# EAGLE board TSOC_CYBLE_R0_1 (EAGLE 6.6.0)
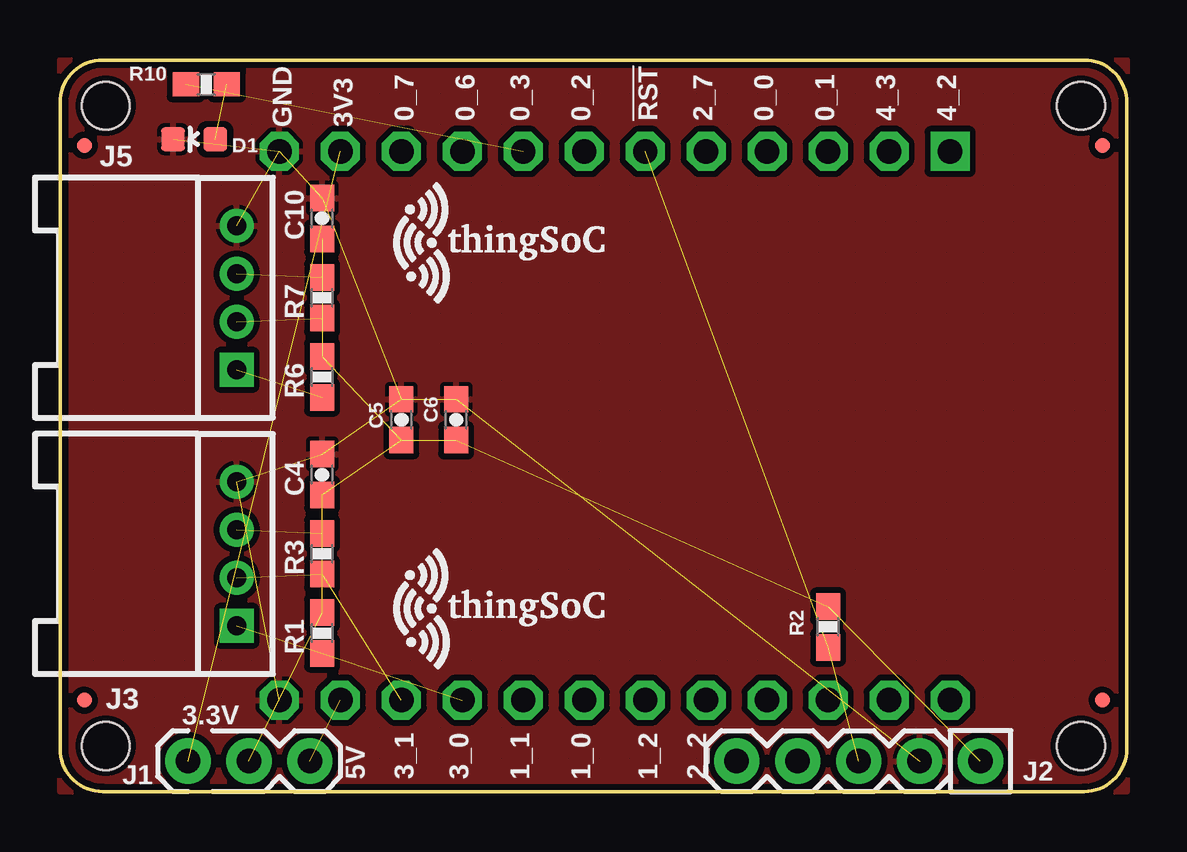
[diagram p0: board, top side]
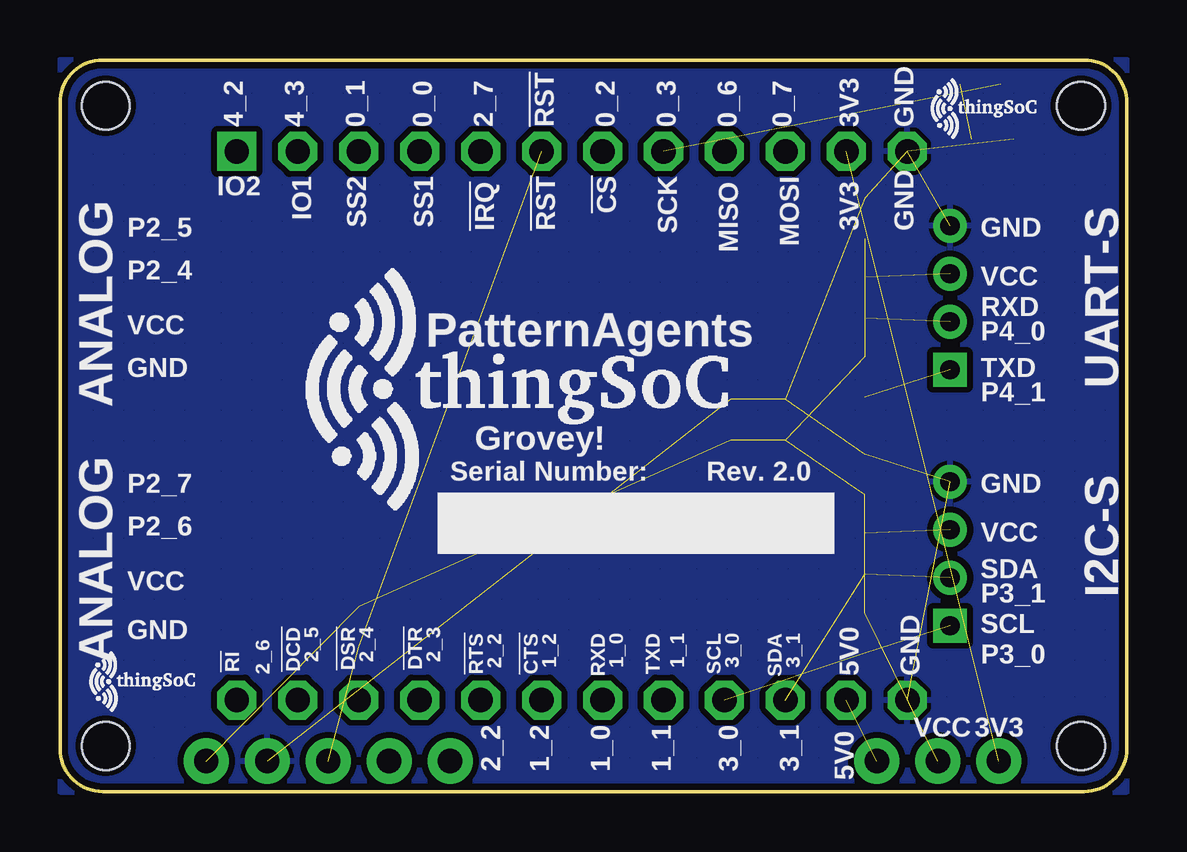
[diagram p1: board, bottom side, seen from below]

Size 44.45 x 30.48 mm. Coordinates in mm from the lower left corner, seen from the top.
Copper layers (1*16): Top 0.035mm / dielectric 1.5mm / Bottom 0.035mm
Design rules "PatternAgents_7mil": minimum track width 7mil, minimum drill 14mil, track to track 7mil, track to pad 7mil, pad to pad 7mil, via to via 7mil, smd to smd 7mil, copper to edge 7mil, drill to drill 7mil, minimum pad ring 12mil, minimum via ring 10mil, stop-mask expansion 4mil, vias tented up to drill 25mil, thermal gap 7mil

## Footprints (pad centres in the part's own frame; a part is rotated, then mirrored left to right if it is on the bottom)
0603-CAP = smd 1.1 x 1: 1 -0.85,0; 2 0.85,0
LED-0603 = smd 1 x 1: A 0,-0.877; C 0,0.877
MICRO-FIDUCIAL = smd 0.635 x 0.635: 1 0,0
JMP-3-NO-PTH-2.54 = drill 1.016 pad 1.88: 1 0,0; 2 2.54,0; 3 5.08,0
PSOC_JTAG_MINSILK = drill 1.016 pad 1.88: 1 -5.08,0; 2 -2.54,0; 3 0,0; 4 2.54,0; 5 5.08,0
HW4-2.0-90D = drill 0.8 pad 1.27 square: 1 -3,0 | drill 0.8 pad 1.27: 2 -1,0; 3 1,0; 4 3,0
0603-RES = smd 1.1 x 1: 1 -0.85,0; 2 0.85,0
TSOC-BB-BRD-DIM = hole 2: 13.335,16.891; -13.335,16.891; 13.335,-23.749; -13.335,-23.749
TSOC-BB-S24 = drill 1.016 square: 1B -11.43,11.43 | drill 1.016 octagon: 1C 11.43,11.43; 2B -11.43,8.89; 2C 11.43,8.89; 3B -11.43,6.35; 3C 11.43,6.35; 4B -11.43,3.81; 4C 11.43,3.81; 5B -11.43,1.27; 5C 11.43,1.27; 6B -11.43,-1.27; 6C 11.43,-1.27; 7B -11.43,-3.81; 7C 11.43,-3.81; 8B -11.43,-6.35; 8C 11.43,-6.35; 9B -11.43,-8.89; 9C 11.43,-8.89; 10B -11.43,-11.43; 10C 11.43,-11.43; 11B -11.43,-13.97; 11C 11.43,-13.97; 12B -11.43,-16.51; 12C 11.43,-16.51

## Placement (x,y rotation side)
C4  1uF  [0603-CAP]  10.92,13.21 90 top
C5  1uF  [0603-CAP]  14.22,15.49 90 top
C6  0.1uF  [0603-CAP]  16.51,15.49 90 top
C10  1uF  [0603-CAP]  10.92,23.88 90 top
D1  [LED-0603]  5.59,27.18 90 top
FID1  FIDUCIALUFIDUCIAL  [MICRO-FIDUCIAL]  1.02,3.81 0 top
FID2  FIDUCIALUFIDUCIAL  [MICRO-FIDUCIAL]  43.43,3.81 0 top
FID3  FIDUCIALUFIDUCIAL  [MICRO-FIDUCIAL]  1.02,26.92 0 top
FID4  FIDUCIALUFIDUCIAL  [MICRO-FIDUCIAL]  43.43,26.92 0 top
J1  [JMP-3-NO-PTH-2.54]  5.33,1.27 0 top
J2  JTAG-ISSPMIN  [PSOC_JTAG_MINSILK]  33.27,1.27 180 top
J3  4P-2.0-90D  [HW4-2.0-90D]  7.37,9.91 90 top
J5  4P-2.0-90D  [HW4-2.0-90D]  7.37,20.57 90 top
R1  2k2  [0603-RES]  10.92,6.6 90 top
R2  10K  [0603-RES]  32,6.86 90 top
R3  2k2  [0603-RES]  10.92,9.91 90 top
R6  DNP  [0603-RES]  10.92,17.27 90 top
R7  DNP  [0603-RES]  10.92,20.57 90 top
R10  1K  [0603-RES]  6.1,29.46 180 top
U$1  TSOC-LOGO-MED  [TSOC-LOGO-MED]  15.49,7.62 0 top
U$2  TSOC-PCB-SINGLE  [TSOC-BB-BRD-DIM]  25.65,15.24 270 top
U$3  TSOC-24-BB  [TSOC-BB-S24]  25.65,15.24 270 top
U$4  TSOC-LOGO-MED  [TSOC-LOGO-MED]  15.49,22.86 0 top
U$100  TSOC-LOGO-SMALL  [TSOC-LOGO-SML]  42.42,4.57 0 bottom
U$101  TSOC-LOGO-LRG  [TSOC-LOGO-LRG]  30.99,16.76 0 bottom
U$102  TSOC-LOGO-SMALL  [TSOC-LOGO-SML]  7.37,28.45 0 bottom

## Library data of the parts
C4 C10 R1 R3 R6 R7 = SparkFun-Passives
C5 C6 R2 R10 = PatternAgents-Misc
D1 FID1-FID4 = TSOC-ESP8266-BASE
J1 = PatternAgents-ProtoPads
J2 = PatternAgents-Cypress
J3 J5 = Seeed-Connector -2016
U$1-U$4 U$100-U$102 = thingSoC

## Nets
3V3: J1.1 U$3.11B
5V0: J1.3 U$3.11C
!XRES: J2.3 R2.1 U$3.6B
GND: C4.2 C5.2 C6.2 C10.2 D1.C J2.2 J3.4 J5.4 U$3.12B U$3.12C
N$17: D1.A R10.1
P0_0: U$3.4B
P0_1: U$3.3B
P0_2: U$3.7B
P0_3: R10.2 U$3.8B
P0_6: U$3.9B
P0_7: U$3.10B
P1_0: U$3.7C
P1_1: U$3.8C
P1_2: U$3.6C
P2_2: U$3.5C
P2_3: U$3.4C
P2_4: U$3.3C
P2_5: U$3.2C
P2_6: U$3.1C
P2_7: U$3.5B
P3_0: J3.1 R1.1 U$3.9C
P3_1: J3.2 R3.1 U$3.10C
P3_2: J2.5
P3_3: J2.4
P4_0: J5.2 R7.1
P4_1: J5.1 R6.1
P4_2: U$3.1B
P4_3: U$3.2B
VCC: C4.1 C5.1 C6.1 C10.1 J1.2 J2.1 J3.3 J5.3 R1.2 R2.2 R3.2 R6.2 R7.2

## Tracks (layer width: path | path; a pad name or v marks a point on that pad's centre or on a via)
3V3  (1 unrouted)
5V0  (1 unrouted)
!XRES  (2 unrouted)
GND  (9 unrouted)
  pour Top (isolate 0.254, rank 2, hatched): 0,0 0,30.48 44.45,30.48 44.45,0
  pour Bottom (isolate 0.254, rank 2, hatched): 0,0 0,30.48 44.45,30.48 44.45,0
N$17  (1 unrouted)
P0_3  (1 unrouted)
P3_0  (2 unrouted)
P3_1  (2 unrouted)
P4_0  (1 unrouted)
P4_1  (1 unrouted)
VCC  (12 unrouted)

## Text on the board
tPlace: GND | 3V3 | 0_7 | 0_6 | 0_3 | 0_2 | !RST | 2_7 | 0_0 | 0_1 | 4_3 | 4_2 | 3.3V | 5V | 3_1 | 3_0 | 1_1 | 1_0 | 1_2 | 2_2 | J2
bPlace: GND | 3V3 | 0_7 | 0_6 | 0_3 | 0_2 | !RST | 2_7 | 0_0 | 0_1 | 4_3 | 4_2 | MOSI | SCK | !CS | !RST | SS1 | SS2 | IO1 | IO2 | MISO | !IRQ | ANALOG | UART-S | GND | GND | 3V3 | P2_5 | VCC | P2_4 | RXD | P4_0 | PatternAgents | VCC | TXD | GND | P4_1 | Grovey! | ANALOG | I2C-S | Rev. 2.0 | Serial Number: | GND | P2_7 | P2_6 | VCC | SDA | P3_1 | VCC | SCL | 3_1 | SDA | 3_0 | SCL | 1_1 | TXD | 1_0 | RXD | 1_2 | !CTS | 2_2 | !RTS | 2_3 | !DTR | 2_4 | !DSR | 2_5 | !DCD | 2_6 | !RI | GND | P3_0 | GND | 5V0 | 5V0 | 3_1 | 3_0 | 1_1 | 1_0 | 1_2 | 2_2 | 3V3 | VCC